# Altium PCB NFC.PcbDoc
Units mil, origin at the board's own origin, x right, y up, seen from the top; angles counter-clockwise.
Board outline 1501 x 1389 mil, 2 copper layers (Top Layer, Bottom Layer); 33 components, 33 nets, 115 pads, 38 vias.
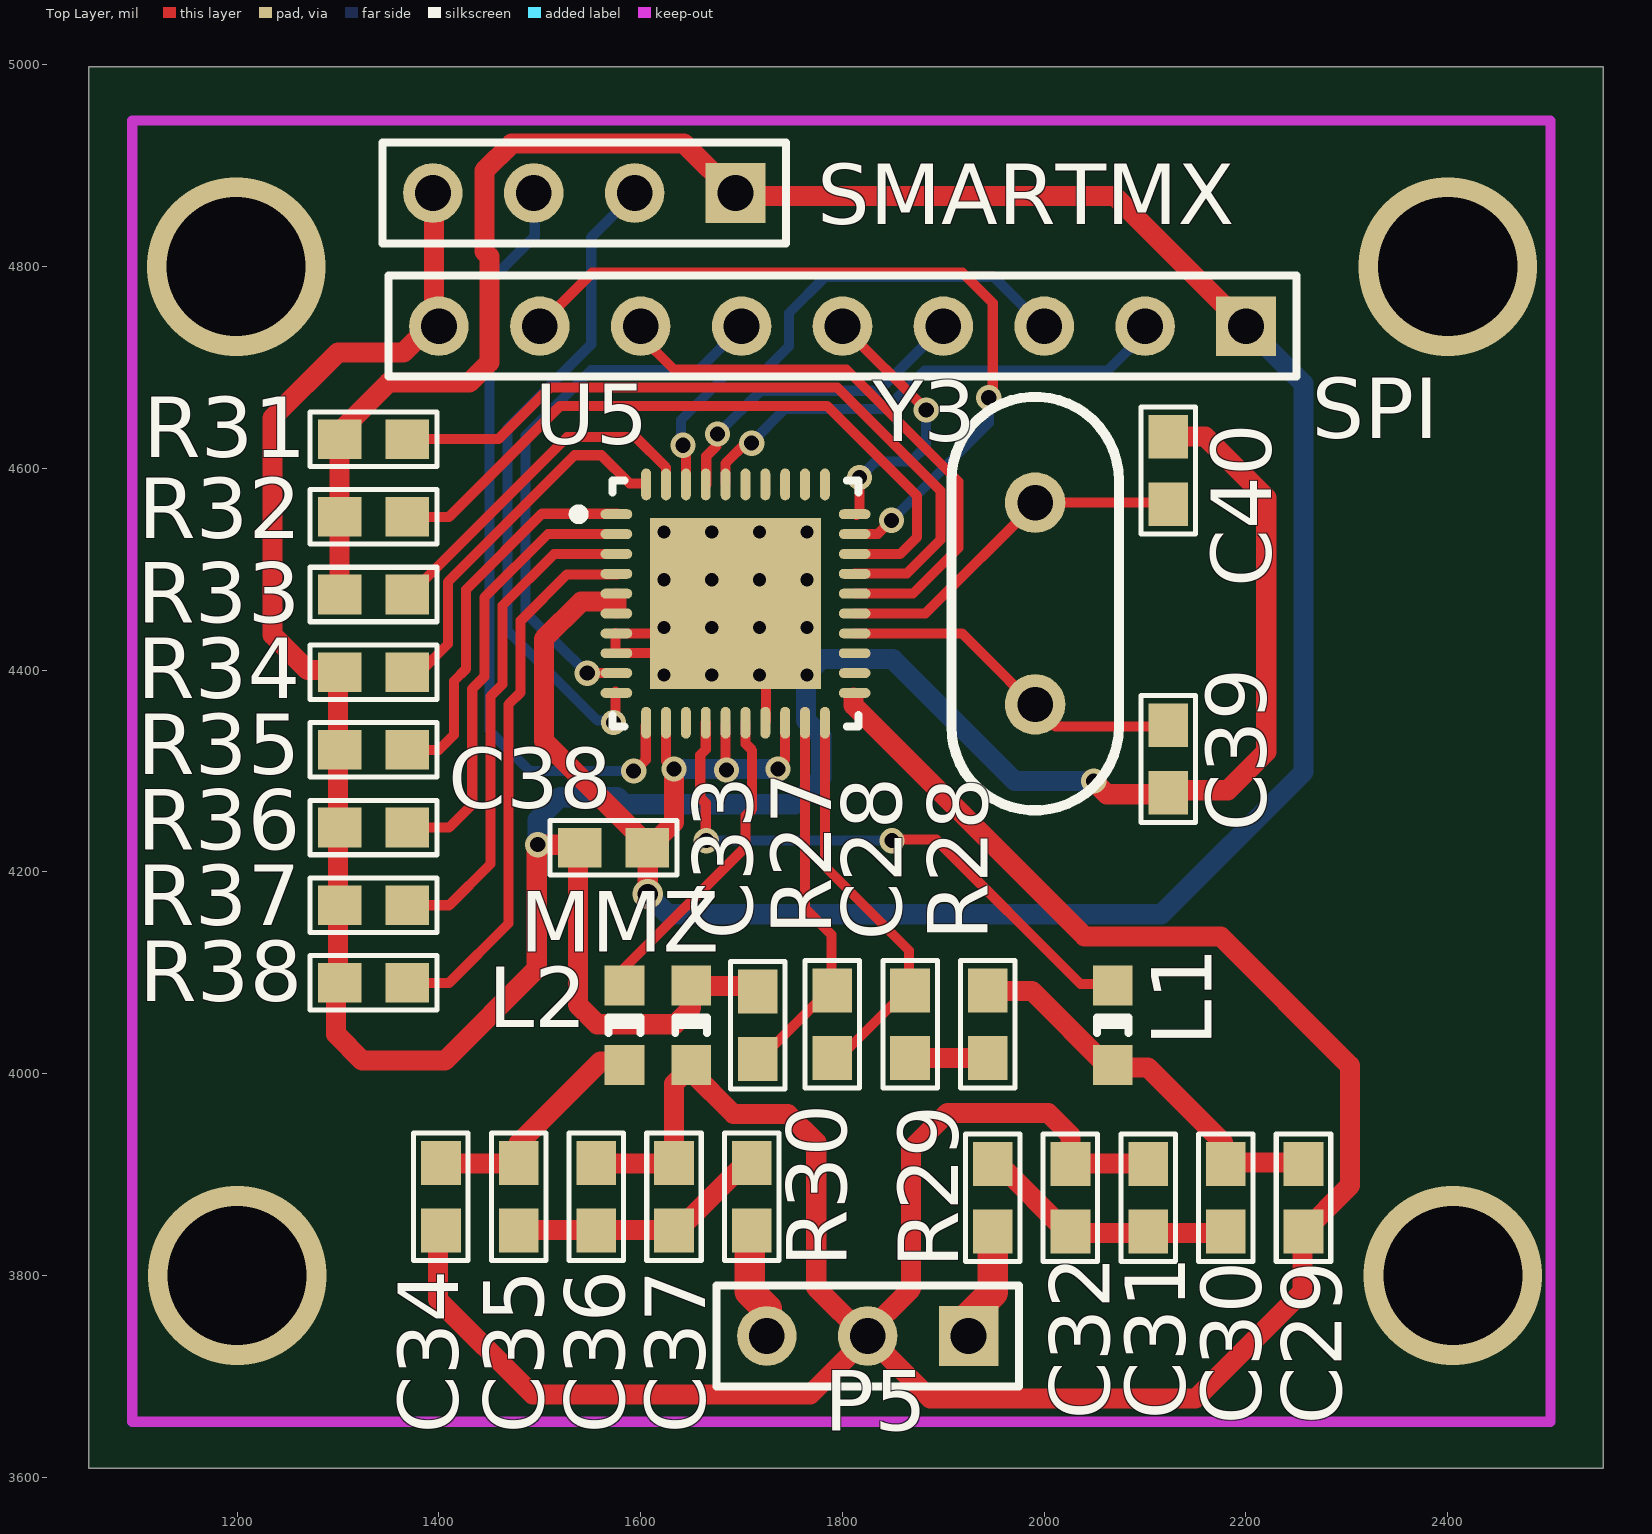
[diagram p0: Top Layer view]
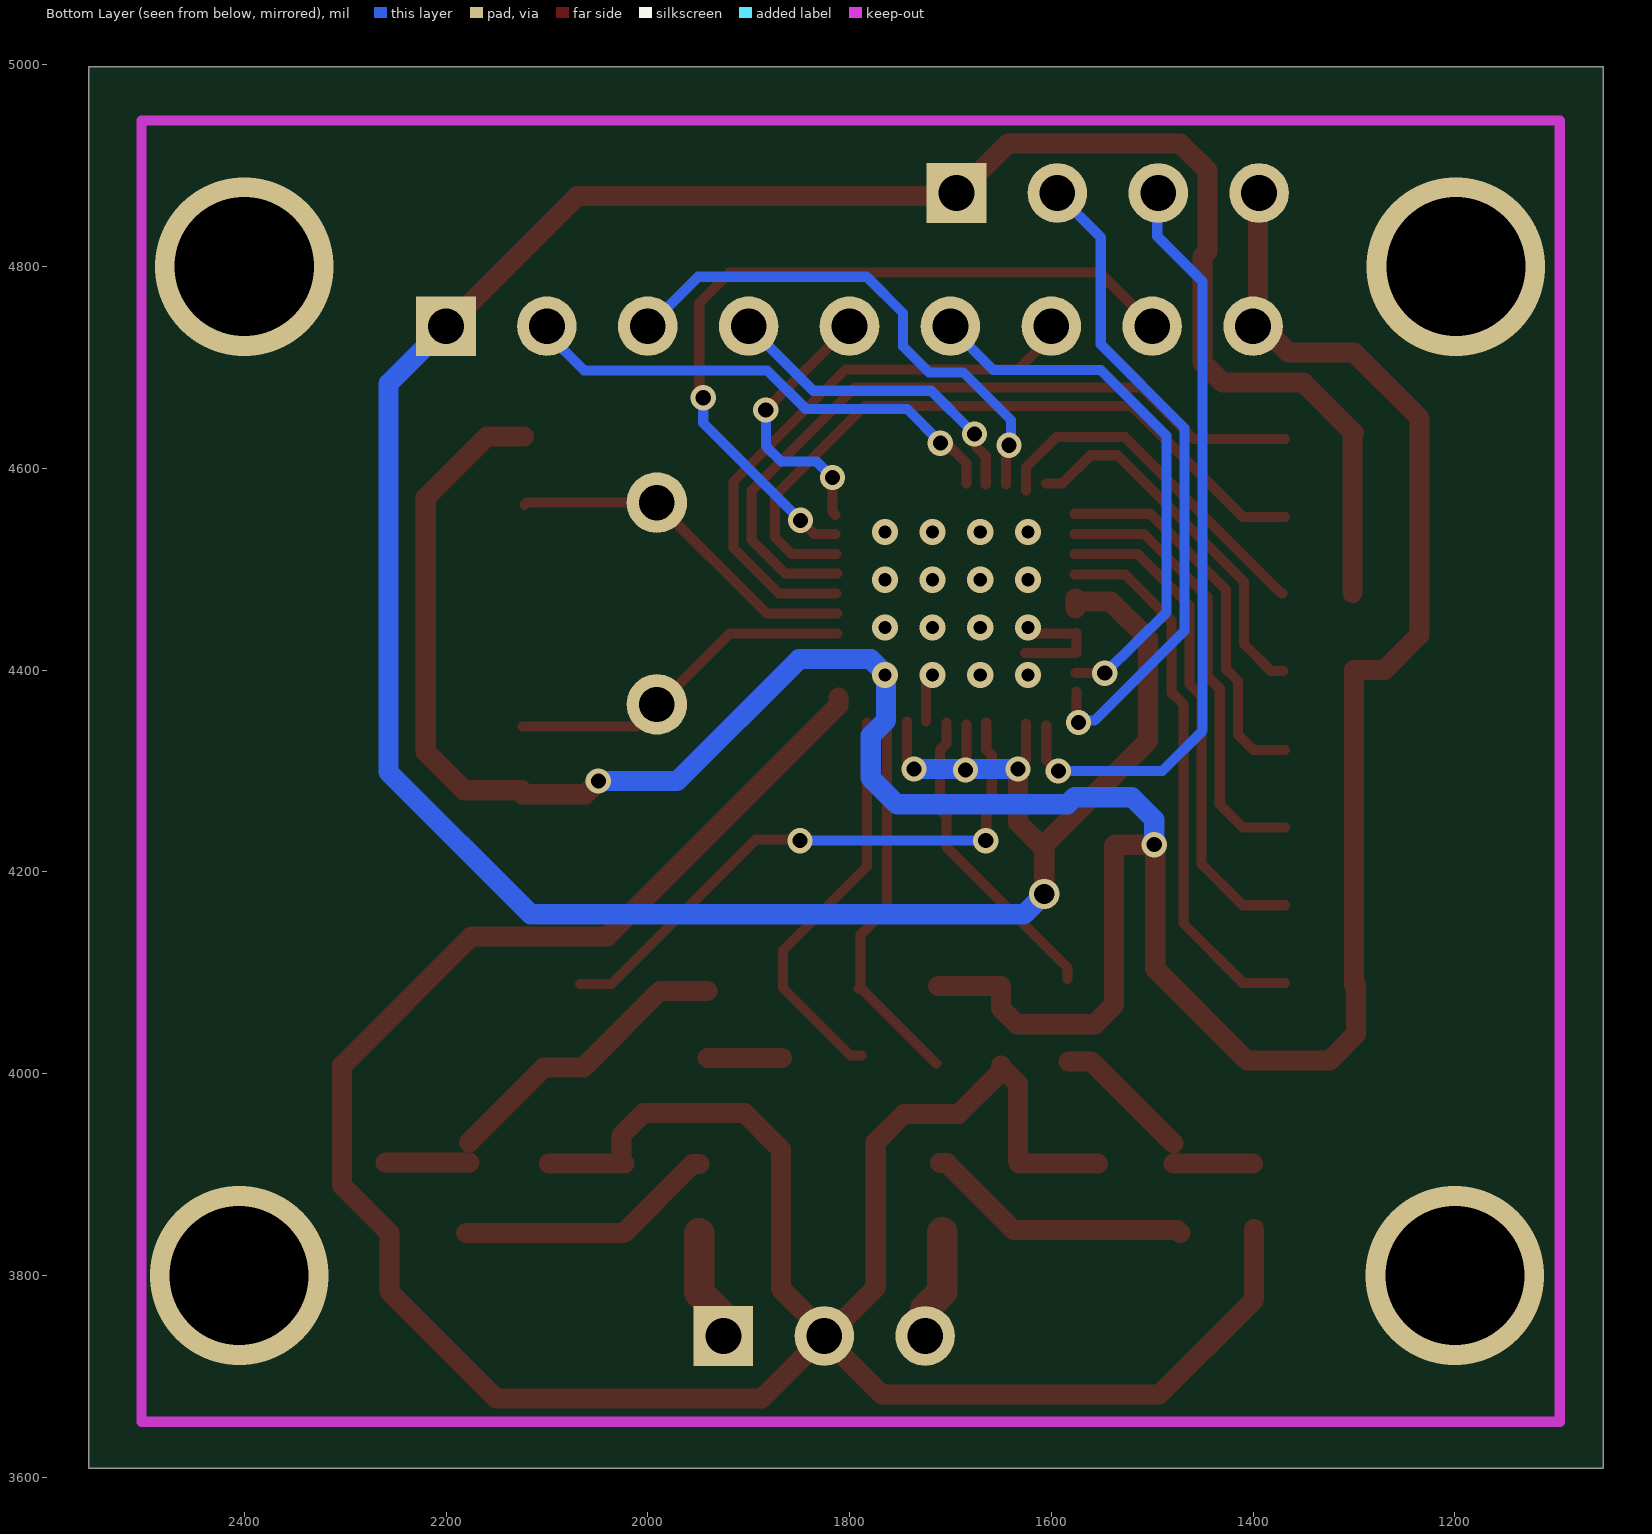
[diagram p1: Bottom Layer view, seen from below]

## Layer stack, top to bottom
Top Layer: signal copper 1.4
Dielectric: dielectric 12.6, FR-4, Dk 4.8
Bottom Layer: signal copper 1.4

## Board outline
1053,4998 2554,4998 2554,3609 1053,3609

## Design rules (kind name [scope] priority, off if disabled: settings)
Clearance [All] p1: gap=8
ComponentClearance [All] p1: gap=10 collisioncheckmode=3 verticalgap=10
HoleSize [All] p1: absolutevalues=TRUE maxlimit=196.85 minlimit=12 maxpercent=80.000 minpercent=20.000
PlaneConnect [All] p1: planeconnectstyle=Relief reliefexpansion=20 reliefentries=4 reliefconductorwidth=15 reliefairgap=15
PolygonConnect [All] p1: connectstyle=Relief reliefconductorwidth=20 reliefentries=4 polygonreliefangle="90 Angle"
RoutingVias [All] p1: holewidth=15 width=25 viastyle="Through Hole" minholewidth=12 minwidth=25 maxholewidth=196.85 maxwidth=314.96
SolderMaskExpansion [All] p1: expansion=4
TestPointUsage [All] p1: valid=0 allowmultiple=FALSE
Testpoint [All] p1: side=15 testpointundercomponent=TRUE minsize=40 maxsize=100 preferedsize=60 minholesize=0 maxholesize=40 preferedholesize=32 testpointgrid=1 style=1023 order=0-112345678
Width [All] p1: maxlimit=40 minlimit=10 preferedwidth=10
16 further rules are at their usual default settings.

## Components (designator, comment, footprint, x,y, rotation, side; value= is the part's Value field where it differs from the comment)
C28 "Cap" 1608[0603] 1867,4049 r270 top
C29 "Cap" 1608[0603] 2257,3877 r90 top
C30 "Cap" 1608[0603] 2180,3877 r270 top
C31 "Cap" 1608[0603] 2103,3877 r270 top
C32 "Cap" 1608[0603] 2026,3877 r270 top
C33 "Cap" 1608[0603] 1716,4048 r90 top
C34 "Cap" 1608[0603] 1402,3878 r270 top
C35 "Cap" 1608[0603] 1479,3878 r270 top
C36 "Cap" 1608[0603] 1556,3878 r90 top
C37 "Cap" 1608[0603] 1633,3878 r90 top
C38 "Cap" 1608[0603] 1573,4224 r0 top
C39 "Cap" 1608[0603] 2123,4312 r90 top
C40 "Cap" 1608[0603] 2123,4598 r270 top
L1 "Inductor" 2012_Chip 2068,4048 r270 top
L2 "Inductor" 2012_Chip 1584,4048 r270 top
MMZ "Inductor" 2012_Chip 1650,4048 r270 top
P5 "Antenna" HDR1X3 1925,3740 r180 top
R27 "RES" 1608[0603] 1790,4049 r270 top
R28 "RES" 1608[0603] 1944,4049 r270 top
R29 "RES" 1608[0603] 1949,3877 r90 top
R30 "RES" 1608[0603] 1710,3878 r90 top
R31 "RES" 1608[0603] 1335,4629 r180 top
R32 "RES" 1608[0603] 1335,4552 r180 top
R33 "RES" 1608[0603] 1335,4475 r0 top
R34 "RES" 1608[0603] 1335,4398 r0 top
R35 "RES" 1608[0603] 1335,4321 r0 top
R36 "RES" 1608[0603] 1335,4244 r0 top
R37 "RES" 1608[0603] 1335,4167 r0 top
R38 "RES" 1608[0603] 1335,4090 r0 top
SMARTMX "Header 4" HDR1X4 1694,4873 r180 top
SPI "Header 9" HDR1X9 2200,4741 r180 top
U5 "PN512-P40" QFN50P600X600-40VN 1694,4466 r0 top
Y3 "27.12MHz" XTAL 1991,4466 r90 top

## Footprints (in the part's own frame and the unit in brackets; to place one, negate y for a bottom-side part, rotate by r counter-clockwise, add the part's x,y. Pads: shape width x height; smd on the part's side, far side on the other; paste and mask are expansions set on the pad)
1608[0603] [mm] "Chip Capacitor; Body 1.6 x 0.8 mm (LxW typ)"
  rect 1.1x1 smd: 1(-0.85,0) 2(0.85,0)
  silkscreen extent -1.6,-0.69 1.6,0.69
2012_Chip [mm] "2012 Chip; Chip Inductor; Body 2.0 x 1.2 mm (LxW typ)"
  rect 1x1 smd: 1(-1,0) 2(1,0)
  silkscreen extent -0.2,-0.4 0.2,0.4
HDR1X3 [mm] "Connector; Header; 3 Position"
  rect 1.5x1.5 hole 0.9: 1(0,0)
  round 1.5 hole 0.9: 2(2.54,0) 3(5.08,0)
  silkscreen extent -1.27,-1.27 6.35,1.27
HDR1X4 [mm] "Connector; Header; 4 Position"
  rect 1.5x1.5 hole 0.9: 1(0,0)
  round 1.5 hole 0.9: 2(2.54,0) 3(5.08,0) 4(7.62,0)
  silkscreen extent -1.27,-1.27 8.89,1.27
HDR1X9 [mm] "Connector; Header; 9 Position"
  rect 1.5x1.5 hole 0.9: 1(0,0)
  round 1.5 hole 0.9: 2(2.54,0) 3(5.08,0) 4(7.62,0) 5(10.16,0) 6(12.7,0) 7(15.24,0) 8(17.78,0) 9(20.32,0)
  silkscreen extent -1.27,-1.27 21.59,1.27
QFN50P600X600-40VN [mm] "QFN, 40-Leads, Body 6x6mm, Pitch 0.5mm, IPC Medium Density"
  oval 0.8x0.25 smd: 1(-3,2.25) 2(-3,1.75) 3(-3,1.25) 4(-3,0.75) 5(-3,0.25) 6(-3,-0.25) 7(-3,-0.75) 8(-3,-1.25) 9(-3,-1.75) 10(-3,-2.25) 21(3,-2.25) 22(3,-1.75) 23(3,-1.25) 24(3,-0.75) 25(3,-0.25) 26(3,0.25) 27(3,0.75) 28(3,1.25) 29(3,1.75) 30(3,2.25)
  oval 0.25x0.8 smd: 11(-2.25,-3) 12(-1.75,-3) 13(-1.25,-3) 14(-0.75,-3) 15(-0.25,-3) 16(0.25,-3) 17(0.75,-3) 18(1.25,-3) 19(1.75,-3) 20(2.25,-3) 31(2.25,3) 32(1.75,3) 33(1.25,3) 34(0.75,3) 35(0.25,3) 36(-0.25,3) 37(-0.75,3) 38(-1.25,3) 39(-1.75,3) 40(-2.25,3)
  rect 4.3x4.3 smd: 41(0,0)
  silkscreen extent -4.07,-3.1 3.1,3.1, body extent -3.08,-3.08 3.08,3.08, height 0.8
XTAL [mil]
  round 60 hole 35: 1(-100,0) 2(100,0)
  silkscreen extent -205,-83 205,83

## Part data
C28 C29 C30 C31 C32 C33 C34 C35 C36 C37 C38 C39 C40: "Capacitor"
P5: library part "Header 3", "Header, 3-Pin"
R27 R28 R29 R30 R31 R32 R33 R34 R35 R36 R37 R38: "Resistor"
SMARTMX: "Header, 4-Pin"
SPI: "Header, 9-Pin"
U5: library part PN511-P40
Y3: library part XTAL, "Crystal Oscillator"

## Via types
v1: diameter 25, hole 15, Top Layer to Bottom Layer, 17 vias
v2: diameter 25.98, hole 12.99, Top Layer to Bottom Layer, tented top, 16 vias
v3: diameter 177.17, hole 137.8, Top Layer to Bottom Layer, 4 vias
v4: diameter 30, hole 20, Top Layer to Bottom Layer, 1 vias

## Nets (pads, with @x,y where several pads share a name; then routed paths per layer and width w, separated by ;. In a path a pad name is that pad's centre, name@x,y a point inside that pad or via, vN(x,y) a via of type N, cw(c..) or ccw(c..) an arc to the next point about the centre after c; other vN are vias at no path point)
AGND: C29.1 C31.1 C32.1 C34.2 C36.2 C37.2 MMZ.2 P5.2 U5.21 | length 2992.7
  Top Layer w20: C34.2@1399,3846 1399,3776 1493,3682 1768,3682 1825,3739 P5.2 ; C36.2@1554,3911 C37.2@1632,3911 ; C37.2@1633,3913 1633,3990 MMZ.2@1648,4005 ; MMZ.2@1650,4008 1650,4002 1692,3960 1746,3960 1774,3932 1774,3788 P5.2@1824,3738 ; U5.21@1811,4373 1811,4365 2040,4136 2175,4136 2303,4008 2303,3889 2256,3842 2256,3784 2150,3678 1887,3678 P5.2@1824,3741 ; P5.2@1820,3740 1820,3739 1868,3787 1868,3925 1904,3961 2004,3961 2026,3939 C32.1@2026,3913 ; C32.1@2023,3911 C31.1@2098,3911
DGND: C33.2 C38.1 C39.1 C40.1 MMZ.1 R34.1 R35.1 R36.1 R37.1 R38.1 SMARTMX.4 SPI.9 U5.7 U5.8 U5.17 U5.41 | length 3284.7
  Top Layer w10: U5.7@1575,4437 1575,4417 U5.41@1626,4417 ; U5.7 1617.47,4436.47 U5.41@1622,4441 ; U5.41@1718,4395 1724,4389 U5.17@1724,4349
  Top Layer w20: R38.1@1298,4088 1298,4039 1324,4013 1406,4013 1497,4104 v1@1497,4227 ; R38.1@1300,4088 1300,4400 1270,4400 1235,4435 1235,4650 1300,4715 1365,4715 1395,4745 1400,4745 1395,4750 SMARTMX.4@1395,4875 ; v1(1498,4227) 1537,4227 C38.1@1537,4225 ; C38.1@1538,4226 1538,4068 1557,4049 1634,4049 1650,4065 MMZ.1@1650,4087 ; MMZ.1@1652,4087 C33.2@1712,4087 ; v1(2049,4290) 2062,4277 C39.1@2124,4277 ; C39.1@2123,4279 2125,4281 2182,4281 2220,4319 2220,4571 2159.54,4631.46 C40.1
  Bottom Layer w20: v1(1498,4227) 1498,4252 1520,4274 1577.05,4274 1584.05,4267 1753,4267 1779,4293 1779,4335 1764,4350 1764,4396 1779,4411 1850,4411 1971,4290 v1(2049,4290)
  other v2: 1623.13,4395.13 1670.38,4395.13 1717.62,4395.13 1764.87,4395.13 1623.13,4442.38 1670.38,4442.38 1717.62,4442.38 1764.87,4442.38 1623.13,4489.62 1670.38,4489.62 1717.62,4489.62 1764.87,4489.62 1623.13,4536.87 1670.38,4536.87 1717.62,4536.87 1764.87,4536.87
IRQ1: SPI.7 U5.26 | length 573.7
  Top Layer w10: SPI.7@1599,4743 1599,4732 1633,4698 1804,4698 1915,4587 1915,4521 1870,4476 U5.26@1813,4476
MISO1: SPI.3 U5.38 | length 523.5
  Top Layer w10: v1@1640,4622 1645,4617 1645,4584.32 U5.38
  Bottom Layer w10: v1@1640,4623 1640,4648 1687,4695 1721,4695 1747,4721 1747,4754 1783,4790 1950,4790 1999,4741 SPI.3
  other v1: 1642,4623
MOSI1: SPI.4 U5.37 | length 321.3
  Top Layer w10: U5.37@1665.01,4584.01 1665.01,4612.01 1675,4622 v1@1675,4635
  Bottom Layer w10: v1@1677.5,4635.5 1719,4677 1836,4677 SPI.4
  other v1: 1676,4634
NCS1: SPI.5 U5.30 | length 273
  Top Layer w10: SPI.5@1797,4740 1801,4740 v1(1883,4658) ; U5.30@1814,4554 1817,4557 v1(1817,4591)
  Bottom Layer w10: v1(1817,4591) 1833,4607 1868,4607 1883,4622 v1(1883,4658)
NetC28_1: C28.1 R27.2 U5.20 | length 403.2
  Top Layer w10: U5.20 1782.58,4205.42 1866,4122 1866,4085 1799,4018 R27.2@1788,4018
NetC28_2: C28.2 R28.2 | length 73.5
  Top Layer w20: C28.2 R28.2@1940.46,4015.54
NetC29_2: C29.2 C30.1 L1.2 R28.1 | length 381.1
  Top Layer w20: R28.1@1941,4082 1988,4082 2064,4006 2103,4006 C30.1@2177,3932 ; C30.1@2177,3912 C29.2@2260,3912
NetC30_2: C30.2 C31.2 C32.2 R29.2 | length 259.4
  Top Layer w20: R29.2 1955.54,3910.46 2024,3842 C30.2@2180,3842
NetC33_1: C33.1 R27.1 U5.19 | length 382.4
  Top Layer w10: C33.1@1714,4010 1788,4084 R27.1@1791,4084 ; U5.19 1762.9,4164.1 1789,4138 R27.1@1789,4084
NetC34_1: C34.1 C35.1 L2.2 | length 216.6
  Top Layer w20: C34.1@1400,3911 C35.1@1479,3911 ; C35.1@1479,3931 1560,4012 L2.2@1583,4012
NetC35_2: C35.2 C36.1 C37.1 R30.2 | length 266.8
  Top Layer w20: C35.2@1472,3842 1475,3845 1637,3845 1703.46,3911.46 R30.2
NetC39_2: C39.2 U5.24 Y3.1 | length 350.2
  Top Layer w10: U5.24 1918.53,4436.47 2011,4344 C39.2@2124,4344
NetC40_2: C40.2 U5.25 Y3.2 | length 356.2
  Top Layer w10: U5.25 1882.16,4456.16 1992,4566 2120,4566 C40.2@2122,4564
NetL1_1: L1.1 U5.14 | length 582.7
  Top Layer w10: v1@1664.47,4230 1664.47,4268.08 1659,4273.55 1659,4315.81 1664.47,4321.29 U5.14 ; v1@1850,4232 1893,4232 2036,4089 L1.1@2067,4089
  Bottom Layer w10: v1(1665,4231) v1(1849,4231)
NetL2_1: L2.1 U5.16 | length 309.1
  Top Layer w10: L2.1@1584,4094 1584,4105 1704,4225 1704,4255.75 1710.5,4262.25 1710.5,4320.5 1704,4327 U5.16@1704,4348
NetP5_1: P5.1 R29.1 | length 106.4
  Top Layer w30: P5.1@1924,3746 1924,3758 1949,3783 R29.1@1949,3842
NetP5_3: P5.3 R30.1 | length 106
  Top Layer w30: R30.1@1708,3843 1708,3784 1725,3767 P5.3@1725,3744
NetR31_1: R31.1 U5.27 | length 739.6
  Top Layer w10: R31.1 1458.83,4629 1509.83,4680 1795,4680 1897,4578 1897,4529 1864,4496 U5.27@1812,4496
NetR32_1: R32.1 U5.28 | length 696.8
  Top Layer w10: R32.1 1410.12,4552 1520.12,4662 1784.72,4662 1874,4572.72 1874,4532 1857,4515 U5.28@1813,4515
NetR33_2: R33.2 U5.39 | length 353.6
  Top Layer w10: R33.2@1371,4476 1372,4476 1527,4631 1595,4631 1625,4601 U5.39@1625,4578
NetR34_2: R34.2 U5.40 | length 371.3
  Top Layer w10: R34.2@1370,4399 1382,4399 1409,4426 1409,4487.54 1534.46,4613 1561,4613 1589,4585 U5.40@1605,4585
NetR35_2: R35.2 U5.1 | length 382.8
  Top Layer w10: R35.2 1400,4321 1415,4336 1415,4389.28 1427,4401.28 1427,4480 1502,4555 U5.1@1577,4555
NetR36_2: R36.2 U5.2 | length 442.2
  Top Layer w10: R36.2 1410.12,4244 1433,4266.88 1433,4381.5 1445,4393.5 1445,4472 1508,4535 U5.2@1577,4535
NetR37_2: R37.2 U5.3 | length 495.7
  Top Layer w10: R37.2 1410.12,4167 1451,4207.88 1451,4374 1463,4386 1463,4464 1514,4515 U5.3@1577,4515
NetR38_2: R38.2 U5.4 | length 545.1
  Top Layer w10: R38.2 1410.12,4090 1469,4148.88 1469,4366.11 1481,4378.11 1481,4449 1527,4495 U5.4@1577,4495
NRSTPD1: SPI.6 U5.9 | length 549.9
  Top Layer w10: v1(1547,4397) U5.9
  Bottom Layer w10: v1(1547,4397) 1486,4457.06 1486,4632.54 1551,4697.54 1657.54,4697.54 SPI.6@1701,4741
NSS1: SPI.8 U5.29 | length 787
  Top Layer w10: SPI.8@1497,4743 SPI.8@1501,4743 ; SPI.8@1498,4740 1552,4794 1919,4794 1949,4764 1949,4674 v1(1945,4670) ; U5.29@1814,4535 1835,4535 v1(1848.5,4548.5)
  Bottom Layer w10: v1(1848.5,4548.5) 1945,4645 v1(1945,4670)
SCK1: SPI.2 U5.36 | length 495.4
  Top Layer w10: U5.36@1684,4585 1684,4605 1705,4626 v1@1709,4626
  Bottom Layer w10: v1@1710,4626 1743,4659 1843.46,4659 1881.46,4697 2063,4697 2100,4734 SPI.2
  other v1: 1710,4625
SIGIN: SMARTMX.2 U5.10 | length 657.1
  Top Layer w10: v1@1575,4350 U5.10@1575,4379
  Bottom Layer w10: v1@1574,4350 1557,4350 1468,4439 1468,4640 1551,4723 1551,4829 SMARTMX.2@1594,4872
  other v1: 1573,4348
SIGOUT: SMARTMX.3 U5.11 | length 760.8
  Top Layer w10: v1@1594,4300 1605,4311 U5.11@1605,4345
  Bottom Layer w10: SMARTMX.3@1495,4875 1495,4830 1450,4785 1450,4340 1490,4300 v1@1591,4300
  other v1: 1593,4300
VCC-3.3V: C38.2 R31.2 R32.2 R33.1 SMARTMX.1 SPI.1 U5.5 U5.6 U5.12 U5.15 U5.18 | length 3267.3
  Top Layer w10: U5.12@1625,4347 1625,4310 v1(1633,4302) ; v1@1684,4302 U5.15@1684,4346 ; v1@1735,4303 1743,4311 U5.18@1743,4349
  Top Layer w20: R31.2@1300,4635 1350,4685 1430,4685 1450,4705 1450,4810 1445,4815 1445,4895 1472,4922 1643,4922 1695,4870 2070,4870 SPI.1@2200,4740 ; R33.1@1301.54,4476.54 R31.2 ; 1572,4468 1541,4468 1504,4431 1504,4330 C38.2@1607,4227 ; U5.6@1576,4461 U5.5@1576,4471 ; C38.2 1608,4224 1633,4249 v1(1633,4302) ; v4(1607,4178) C38.2@1607,4224
  Bottom Layer w20: v4(1607,4178) 1627,4158 2116,4158 2257,4299 2257,4684 SPI.1@2199,4742 ; v1(1633,4302) v1@1734,4302
  other v1: 1685,4301 1736,4302
pads on no net: U5.13 U5.22 U5.23 U5.31 U5.32 U5.33 U5.34 U5.35
copper on no net:
  other v3: 1200,3800 2405,3800 1199,4800 2400,4800

## Keep-outs
Keep-Out Layer:
  lines w10: 1096,3655 1096,4945 2502,4945 2502,3655 1096,3655

## Dimensions
1096,3655 to 1096,4945 on Keep-Out Layer
1096,3655 to 2502,3655 on Keep-Out Layer